# EAGLE board Small e-PaperShield v2.1 (EAGLE 6.4)
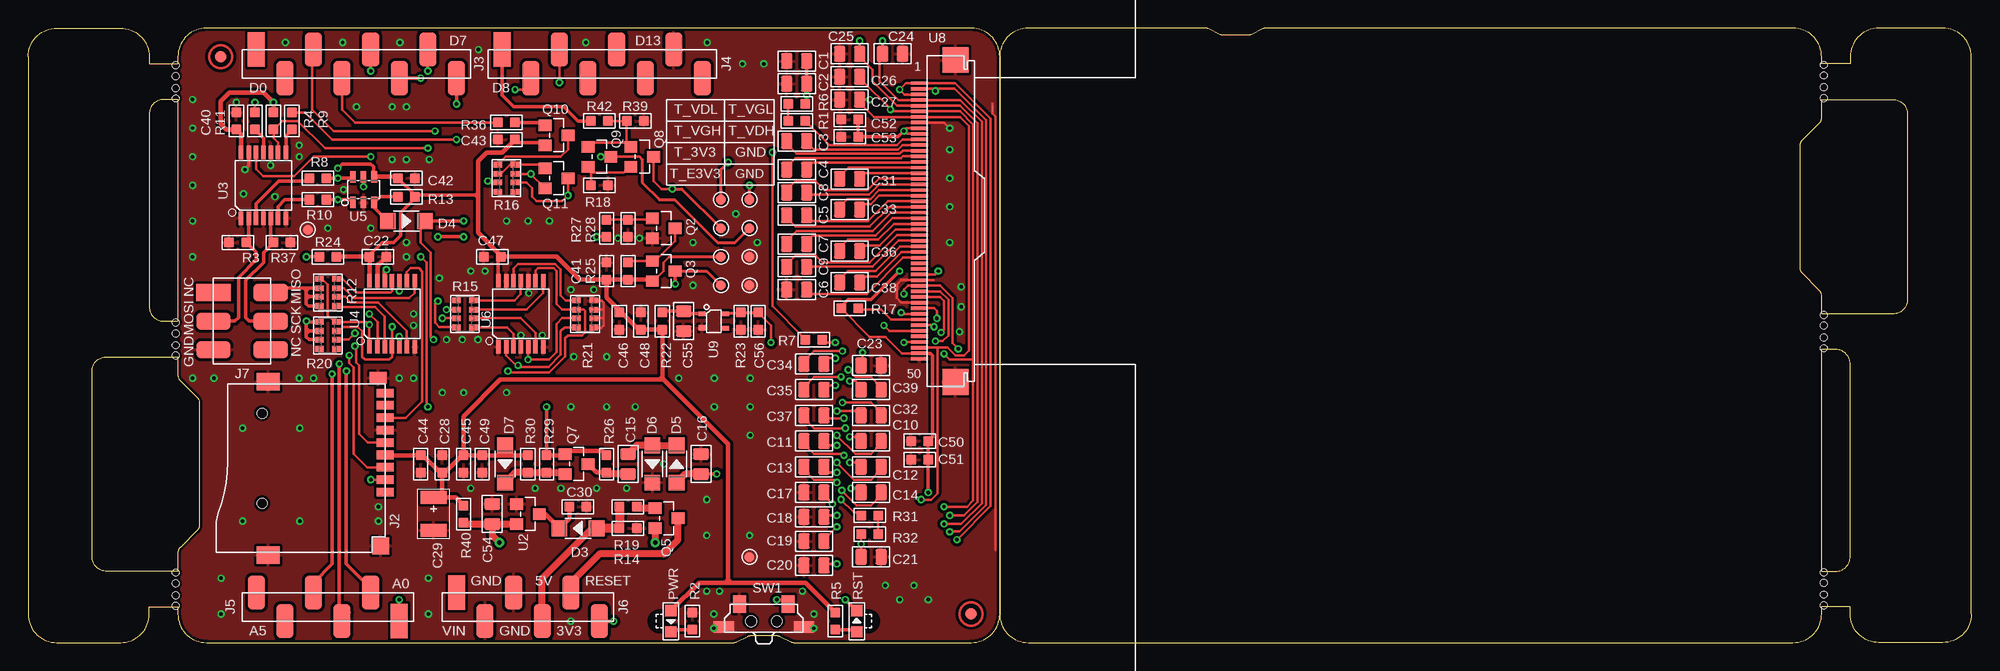
[diagram p0: board, top side]
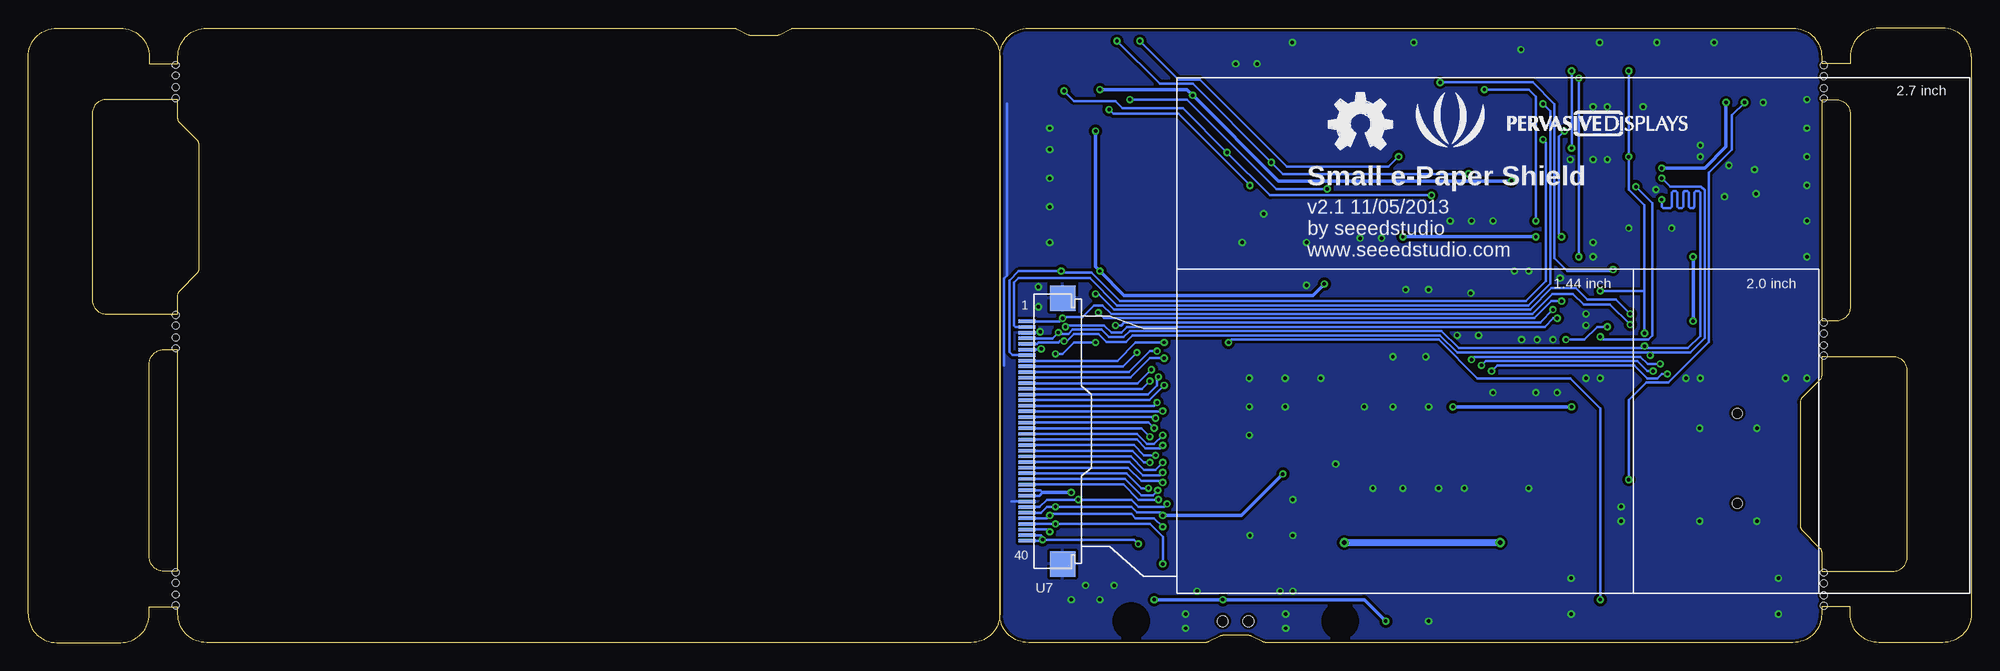
[diagram p1: board, bottom side, seen from below]

Size 172.62 x 54.61 mm. Coordinates in mm from the lower left corner, seen from the top.
Outline: 86.31,52.07 arc90 83.77,54.61 15.84,54.61 arc90 13.3,52.07 13.3,51.44 10.76,51.44 10.76,52.07 arc90 8.22,54.61 2.54,54.61 arc90 0,52.07 0,2.54 arc90 2.54,0 8.22,0 arc90 10.76,2.54 10.76,3.18 13.3,3.18 13.3,2.54 arc90 15.84,0 62.66,0 arc27 62.95,0.07 63.95,0.57 arc-27 64.23,0.63 66.47,0.63 arc-27 66.76,0.57 67.76,0.07 arc27 68.04,0 83.77,0 arc90 86.31,2.54
Outline: 86.31,2.54 86.31,52.07
Outline: 86.31,2.54 arc90 88.85,0 156.78,0 arc90 159.32,2.54 159.32,3.18 161.86,3.18 161.86,2.54 arc90 164.4,0 170.08,0 arc90 172.62,2.54 172.62,52.07 arc90 170.08,54.61 164.4,54.61 arc90 161.86,52.07 161.86,51.44 159.32,51.44 159.32,52.07 arc90 156.78,54.61 109.95,54.61 arc27 109.67,54.54 108.67,54.04 arc-27 108.38,53.98 106.14,53.98 arc-27 105.86,54.04 104.86,54.54 arc27 104.57,54.61 88.85,54.61 arc90 86.31,52.07
Outline: 86.31,52.07 86.31,2.54
Outline: 13.3,48.26 13.3,28.57 12.03,28.57 arc-90 10.76,29.84 10.76,46.99 arc-90 12.03,48.26 13.3,48.26
Outline: 13.3,25.4 13.3,23.76 arc45 13.49,23.31 15.02,21.78 arc-45 15.2,21.33 15.2,10.42 arc-45 15.02,9.97 13.49,8.44 arc45 13.3,7.99 13.3,6.35 6.95,6.35 arc-90 5.68,7.62 5.68,24.13 arc-90 6.95,25.4 13.3,25.4
Outline: 159.32,6.35 159.32,26.04 160.59,26.04 arc-90 161.86,24.77 161.86,7.62 arc-90 160.59,6.35 159.32,6.35
Outline: 159.32,29.21 159.32,30.85 arc45 159.13,31.3 157.6,32.83 arc-45 157.41,33.28 157.41,44.19 arc-45 157.6,44.64 159.13,46.17 arc45 159.32,46.62 159.32,48.26 165.67,48.26 arc-90 166.94,46.99 166.94,30.48 arc-90 165.67,29.21 159.32,29.21
Copper layers (1*16): Top 0.035mm / dielectric 1.5mm / Bottom 0.035mm
Design rules "SeeedStudio_rule_no_angle_090911 *": minimum track width 6mil, minimum drill 12mil, track to track 6mil, track to pad 6mil, pad to pad 6mil, via to via 6mil, smd to smd 0mil, copper to edge 10mil, drill to drill 10mil, minimum pad ring 10mil, minimum via ring 6mil, stop-mask expansion 2mil, vias tented up to drill 100mil, thermal gap 10mil
Net classes: 0 default: width 0.152 mm, drill 0.305 mm, clearance 0.152 mm
Holes 0.6 mm at 13.1,28.45 13.1,27.48 13.1,26.43 13.1,25.5 13.1,51.31 13.1,50.34 13.1,49.29 13.1,48.36 13.1,6.22 13.1,5.26 13.1,4.2 13.1,3.28 159.52,26.16 159.52,27.13 159.52,28.18 159.52,29.11 159.52,3.3 159.52,4.27 159.52,5.32 159.52,6.25 159.52,48.39 159.52,49.35 159.52,50.41 159.52,51.33
tRestrict: area 50,29.9 to 50.5,30.1; area 50,29.9 to 50.5,30.1; area 50,29.1 to 50.5,29.3; area 49.9,28.3 to 50.6,28.5; area 55.3,1.1 to 56.9,2.7; area 73.8,1.1 to 75.4,2.7
bRestrict: area 54.7,0.5 to 57.5,3.3; area 73.2,0.5 to 76,3.3

## Footprints (pad centres in the part's own frame; a part is rotated, then mirrored left to right if it is on the bottom)
C0805 = smd 1.016 x 1.397: 1 -0.889,0; 2 0.889,0
C0603 = smd 0.889 x 0.889: 1 -0.762,0; 2 0.762,0
AVX-B = smd 1.143 x 2.286: + -1.46,0; - 1.46,0
SOD123 = smd 1.397 x 1.397: + -1.651,0; - 1.651,0
TP_3535 = smd 0.889 x 0.889: T 0,0
9P-SMD-W/-RING = smd 1.524 x 0.762: 1 0,4.4; 2 0,3.3; 3 0,2.2; 4 0,1.1; 5 0,0; 6 0,-1.1; 7 0,-2.2; 8 0,-3.3; 9 0,-4.4 | smd 1.524 x 1.016: G1 0.6,-5.746 | smd 2.032 x 1.524: G2 10.373,-5.4; G3 10.373,10 | smd 1.524 x 1.524: G4 0.392,9.181 | hole 0.889: 10.9,-2.6; 10.9,5.4
8P-2.54-SMD = smd 3.048 x 1.524: 1 1.27,8.89; 2 -1.27,6.35; 3 1.27,3.81; 4 -1.27,1.27; 5 1.27,-1.27; 6 -1.27,-3.81; 7 1.27,-6.35; 8 -1.27,-8.89
6P-2.54-SMD = smd 3.048 x 1.524: 1 1.27,6.35; 2 -1.27,3.81; 3 1.27,1.27; 4 -1.27,-1.27; 5 1.27,-3.81; 6 -1.27,-6.35
2X3P-2.54-SMD = smd 3.048 x 1.524: 1 -2.54,2.54; 2 -2.54,0; 3 -2.54,-2.54; 4 2.54,-2.54; 5 2.54,0; 6 2.54,2.54
ROUND-MARK-1.0 = smd 1.016 x 1.016: P$1 0,0
LED-SIDE-VIEW-0603-RIGHT = smd 1 x 1: 1 0,-0.95; 2 0,0.95
SOT23 = smd 1.016 x 1.143: 1 -0.889,-1.016; 2 0.889,-1.016; 3 0,1.016
R0603 = smd 0.889 x 0.889: 1 -0.762,0; 2 0.762,0
1206-8-3.3X2.4 = smd 0.508 x 0.762: 1 -1.206,-0.762; 2 -0.381,-0.762; 3 0.381,-0.762; 4 1.206,-0.762; 5 1.206,0.762; 6 0.381,0.762; 7 -0.381,0.762; 8 -1.206,0.762
4P-SMD-7X3.5X3.5H = smd 1.143 x 1.524: 1 -2.159,1.524; 2 2.159,1.524 | smd 1.778 x 1.016: S1 -3.556,-0.508; S2 3.556,-0.508 | hole 0.95: -1.15,0; 1.15,0
TSSOP14 = smd 0.4 x 1.2: 1 -2,-2.925; 2 -1.3,-2.925; 3 -0.65,-2.925; 4 0,-2.925; 5 0.65,-2.925; 6 1.3,-2.925; 7 2,-2.925; 8 2,2.925; 9 1.3,2.925; 10 0.65,2.925; 11 0,2.925; 12 -0.65,2.925; 13 -1.3,2.925; 14 -2,2.925
SOT23-6 = smd 0.508 x 1.016: 1 -0.95,-1.143; 2 0,-1.143; 3 0.95,-1.143; 4 0.95,1.143; 5 0,1.143; 6 -0.95,1.143
40P-0.5 = smd 1.524 x 0.305: 1 -0.762,9.75; 2 -0.762,9.25; 3 -0.762,8.75; 4 -0.762,8.25; 5 -0.762,7.75; 6 -0.762,7.25; 7 -0.762,6.75; 8 -0.762,6.25; 9 -0.762,5.75; 10 -0.762,5.25; 11 -0.762,4.75; 12 -0.762,4.25; 13 -0.762,3.75; 14 -0.762,3.25; 15 -0.762,2.75; 16 -0.762,2.25; 17 -0.762,1.75; 18 -0.762,1.25; 19 -0.762,0.75; 20 -0.762,0.25; 21 -0.762,-0.25; 22 -0.762,-0.75; 23 -0.762,-1.25; 24 -0.762,-1.75; 25 -0.762,-2.25; 26 -0.762,-2.75; 27 -0.762,-3.25; 28 -0.762,-3.75; 29 -0.762,-4.25; 30 -0.762,-4.75; 31 -0.762,-5.25; 32 -0.762,-5.75; 33 -0.762,-6.25; 34 -0.762,-6.75; 35 -0.762,-7.25; 36 -0.762,-7.75; 37 -0.762,-8.25; 38 -0.762,-8.75; 39 -0.762,-9.25; 40 -0.762,-9.75 | smd 2.286 x 2.286: P1 2.413,11.811; P2 2.413,-11.811
50P-0.5 = smd 1.524 x 0.305: 1 -0.762,12.25; 2 -0.762,11.75; 3 -0.762,11.25; 4 -0.762,10.75; 5 -0.762,10.25; 6 -0.762,9.75; 7 -0.762,9.25; 8 -0.762,8.75; 9 -0.762,8.25; 10 -0.762,7.75; 11 -0.762,7.25; 12 -0.762,6.75; 13 -0.762,6.25; 14 -0.762,5.75; 15 -0.762,5.25; 16 -0.762,4.75; 17 -0.762,4.25; 18 -0.762,3.75; 19 -0.762,3.25; 20 -0.762,2.75; 21 -0.762,2.25; 22 -0.762,1.75; 23 -0.762,1.25; 24 -0.762,0.75; 25 -0.762,0.25; 26 -0.762,-0.25; 27 -0.762,-0.75; 28 -0.762,-1.25; 29 -0.762,-1.75; 30 -0.762,-2.25; 31 -0.762,-2.75; 32 -0.762,-3.25; 33 -0.762,-3.75; 34 -0.762,-4.25; 35 -0.762,-4.75; 36 -0.762,-5.25; 37 -0.762,-5.75; 38 -0.762,-6.25; 39 -0.762,-6.75; 40 -0.762,-7.25; 41 -0.762,-7.75; 42 -0.762,-8.25; 43 -0.762,-8.75; 44 -0.762,-9.25; 45 -0.762,-9.75; 46 -0.762,-10.25; 47 -0.762,-10.75; 48 -0.762,-11.25; 49 -0.762,-11.75; 50 -0.762,-12.25 | smd 2.286 x 2.286: P1 2.413,14.311; P2 2.413,-14.311
SC-82AB = smd 0.4 x 0.6: 1 -0.65,-1.05; 3 0.65,1.05; 4 -0.65,1.05 | smd 0.5 x 0.6: 2 0.6,-1.05

## Placement (x,y rotation side)
C1  DNP  [C0805]  68.27,51.69 180 top
C2  DNP  [C0805]  68.27,49.66 180 top
C3  DNP  [C0805]  68.27,44.58 180 top
C4  DNP  [C0805]  68.27,42.04 0 top
C5  DNP  [C0805]  68.27,37.97 180 top
C6  DNP  [C0805]  68.27,31.37 180 top
C7  DNP  [C0805]  68.27,35.43 0 top
C8  DNP  [C0805]  68.27,40 0 top
C9  DNP  [C0805]  68.27,33.4 0 top
C10  2.2uF  [C0805]  74.88,17.91 0 top
C11  2.2uF  [C0805]  69.8,17.91 180 top
C12  2.2uF  [C0805]  74.88,15.62 0 top
C13  2.2uF  [C0805]  69.8,15.62 180 top
C14  2.2uF  [C0805]  74.88,13.33 0 top
C15  2.2uF  [C0805]  53.29,15.88 90 top
C16  2.2uF  [C0805]  59.77,15.88 270 top
C17  2.2uF  [C0805]  69.8,13.33 0 top
C18  2.2uF  [C0805]  69.8,11.18 0 top
C19  2.2uF  [C0805]  69.8,9.02 0 top
C20  2.2uF  [C0805]  69.8,6.86 0 top
C21  DNP  [C0805]  74.88,7.62 180 top
C22  100nF  [C0603]  31.06,34.29 180 top
C23  2.2uF  [C0805]  74.88,24.64 180 top
C24  DNP  [C0805]  76.78,52.32 0 top
C25  DNP  [C0805]  72.97,52.32 180 top
C26  DNP  [C0805]  72.97,50.29 180 top
C27  DNP  [C0805]  72.97,48.26 180 top
C28  100nF  [C0603]  36.78,15.88 270 top
C29  100uF 6.3V  [AVX-B]  36.02,11.43 270 top
C30  100nF  [C0603]  48.84,12.06 180 top
C31  DNP  [C0805]  72.97,41.21 0 top
C32  2.2uF  [C0805]  74.88,20.19 180 top
C33  DNP  [C0805]  72.97,38.48 0 top
C34  2.2uF  [C0805]  69.8,24.77 0 top
C35  2.2uF  [C0805]  69.8,22.48 0 top
C36  DNP  [C0805]  72.97,34.8 0 top
C37  2.2uF  [C0805]  69.8,20.19 180 top
C38  DNP  [C0805]  72.97,32 0 top
C39  2.2uF  [C0805]  74.88,22.48 180 top
C40  100nF  [C0603]  18.49,46.36 270 top
C41  100nF  [C0603]  51.38,33.02 270 top
C42  100nF  [C0603]  33.6,41.27 180 top
C43  100nF  [C0603]  42.49,44.7 0 top
C44  100nF  [C0603]  34.87,15.88 90 top
C45  100nF  [C0603]  38.68,15.88 90 top
C46  100nF  [C0603]  52.53,28.57 90 top
C47  100nF  [C0603]  41.22,34.29 0 top
C48  100nF  [C0603]  54.43,28.57 270 top
C49  100nF  [C0603]  40.33,15.88 90 top
C50  100nF  [C0603]  79.2,17.91 0 top
C51  100nF  [C0603]  79.2,16.26 0 top
C52  100nF  [C0603]  72.97,46.48 0 top
C53  100nF  [C0603]  72.97,44.96 0 top
C54  2.2uF  [C0805]  41.22,11.43 90 top
C55  2.2uF  [C0805]  58.24,28.57 270 top
C56  100nF  [C0603]  64.85,28.57 90 top
D3  B5819W  [SOD123]  48.84,10.16 180 top
D4  B5819W  [SOD123]  33.6,37.47 0 top
D5  B5819W  [SOD123]  57.61,15.88 90 top
D6  B5819W  [SOD123]  55.45,15.88 270 top
D7  DNP  [SOD123]  42.37,15.88 270 top
GND  [TP_3535]  64.08,31.75 0 top
J2  3300060P1-ST-TF-003A  [9P-SMD-W/-RING]  31.7,17.78 180 top
J3  2.54-8p-male-SMD  [8P-2.54-SMD]  29.16,51.44 90 top
J4  2.54-8p-male-SMD  [8P-2.54-SMD]  51,51.44 90 top
J5  2.54-6p-male-SMD  [6P-2.54-SMD]  26.62,3.18 270 top
J6  2.54-6p-male-SMD  [6P-2.54-SMD]  44.4,3.18 90 top
J7  2.54-2x3p-female-SMD  [2X3P-2.54-SMD]  19,28.57 0 top
P1  [ROUND-MARK-1.0]  17.09,52.07 0 top
P2  [ROUND-MARK-1.0]  83.77,2.54 0 top
PWR  led-green  [LED-SIDE-VIEW-0603-RIGHT]  57.1,1.91 180 top
Q2  2N7002  [SOT23]  56.46,36.83 270 top
Q3  MOSFET-P-044021001  [SOT23]  56.46,33.02 270 top
Q5  MOSFET-P-044021001  [SOT23]  56.72,11.05 270 top
Q7  MOSFET-P-044021001  [SOT23]  48.72,15.88 270 top
Q8  2N7002  [SOT23]  54.56,43.18 270 top
Q9  2N7002  [SOT23]  50.75,43.18 270 top
Q10  MOSFET-P-044021001  [SOT23]  46.94,45.09 270 top
Q11  2N7002  [SOT23]  46.94,41.27 270 top
R1  DNP  [R0603]  68.27,46.36 180 top
R2  1k  [R0603]  59,1.91 90 top
R3  100k  [R0603]  18.62,35.56 180 top
R4  100k  [R0603]  21.79,46.36 90 top
R5  1k  [R0603]  71.7,1.91 270 top
R6  DNP  [R0603]  68.27,47.88 0 top
R7  DNP  [R0603]  69.8,26.92 0 top
R8  100R  [R0603]  25.73,41.27 0 top
R9  100R  [R0603]  23.44,46.36 90 top
R10  100R  [R0603]  25.73,39.37 0 top
R11  100R  [R0603]  20.14,46.36 90 top
R12  1k  [1206-8-3.3X2.4]  26.62,31.11 90 top
R13  100k  [R0603]  33.6,39.62 0 top
R14  1M  [R0603]  53.29,10.16 180 top
R15  DNP  [1206-8-3.3X2.4]  38.81,29.21 90 top
R16  100k  [1206-8-3.3X2.4]  42.49,41.27 270 top
R17  DNP  [R0603]  72.97,29.72 180 top
R18  0R  [R0603]  50.75,40.64 180 top
R19  1k  [R0603]  53.29,12.06 0 top
R20  100k  [1206-8-3.3X2.4]  26.62,27.3 270 top
R21  DNP  [1206-8-3.3X2.4]  49.48,29.21 90 top
R22  100R  [R0603]  56.34,28.57 90 top
R23  1M  [R0603]  63.32,28.57 90 top
R24  1k  [R0603]  26.62,34.29 180 top
R25  100k  [R0603]  53.29,33.02 90 top
R26  DNP  [R0603]  51.38,15.88 90 top
R27  1k  [R0603]  51.38,36.83 90 top
R28  100k  [R0603]  53.29,36.83 90 top
R29  100k  [R0603]  46.05,15.88 90 top
R30  0R  [R0603]  44.4,15.88 90 top
R31  1k  [R0603]  74.75,11.3 180 top
R32  1k  [R0603]  74.75,9.65 0 top
R36  1k  [R0603]  42.49,46.23 0 top
R37  100k  [R0603]  22.55,35.56 0 top
R39  100k  [R0603]  53.92,46.36 180 top
R40  0R  [R0603]  38.68,11.43 270 top
R42  1k  [R0603]  50.75,46.36 180 top
RST  led-red  [LED-SIDE-VIEW-0603-RIGHT]  73.61,1.91 0 top
SW1  BUTTON-4P-REINFORCE'TS-1188E'  [4P-SMD-7X3.5X3.5H]  65.35,1.91 0 top
T_3V3  [TP_3535]  61.54,34.29 90 top
T_E3V3  [TP_3535]  61.54,31.75 270 top
T_VDH  [TP_3535]  64.08,36.83 270 top
T_VDL  [TP_3535]  61.54,39.37 180 top
T_VGH  [TP_3535]  61.54,36.83 270 top
T_VGL  [TP_3535]  64.08,39.37 90 top
TP7  [TP_3535]  24.84,36.7 0 top
TP8  [TP_3535]  64.08,7.62 0 top
TP9  [TP_3535]  64.08,34.29 0 top
U2  XC6206-3.3-1300260P1  [SOT23]  44.4,11.43 270 top
U3  74VHC125PW  [TSSOP14]  20.9,40.64 0 top
U4  74VHC125PW  [TSSOP14]  32.33,29.21 0 top
U5  GT20L16P1Y  [SOT23-6]  29.79,40.26 0 top
U6  DNP  [TSSOP14]  43.76,29.21 0 top
U7  EPD 1.44/2.0/2.7 inch  [40P-0.5]  83.13,18.8 0 bottom
U8  DNP  [50P-0.5]  79.96,37.47 0 top
U9  S-8120CNB-DRB-TF-G//200021001  [SC-82AB]  60.91,28.57 270 top
U$20  [LOGO_SILK]  46.3,45.72 0 bottom
U$47  [OSHW_FILLX200_NOTEXT]  57.1,43.81 0 bottom

## Library data of the parts
C1-C56 D3-D7 PWR Q2 Q8 Q9 Q11 R1-R32 R36 R37 R39 R40 R42 RST SW1 = Discrete
GND P1 P2 T_3V3 T_E3V3 T_VDH T_VDL T_VGH T_VGL TP7-TP9 = Discrete; PARTNO: DNP
J2 = OPL-NEW
J3-J7 = Connector
Q3 Q5 Q7 Q10 U2 = OPL
U3 U4 U6 = IC
U5 U8 U9 = template
U7 = moudle
U$20 U$47 = Logo

## Nets
3V3_LOG: R20.1 R20.2 R20.3 R24.2
/EPD_CS: R12.5 R20.8 U4.1 U7.1 U8.41
/SD_CS: J2.2 R11.2
/WS_CS: D4.+ R13.1 U5.3
ADC_IN: R7.2 U7.8
EPD_/RESET: R9.2 U7.7 U8.35
EPD_BORDER: Q11.3 R7.1 R16.6 U7.38 U8.2
EPD_CKV: R15.7 U8.44
EPD_OE123: R15.8 U8.42
EPD_SO: U4.2 U7.6 U8.37
EPD_STV_IN: R15.6 U8.45
EPD_VCL: C23.2 U7.9
EPD_VCOM_PANEL: C1.1 C2.1 C21.2 R6.2 R16.3 R32.1 U7.39 U7.40 U8.1 U8.3
EPD_VDH: C19.2 C25.1 Q9.3 T_VDH.T U7.36 U8.5
EPD_VDL: C20.2 C24.1 Q11.2 R16.7 T_VDL.T U7.37 U8.4
EPD_VGH: C17.2 C27.1 Q8.3 T_VGH.T U7.34 U8.7 U8.48
EPD_VGL: C16.2 C18.2 C26.1 D5.+ T_VGL.T U7.35 U8.6 U8.47
GND: C1.2 C2.2 C6.2 C16.1 C17.1 C18.1 C19.1 C20.1 C21.1 C22.1 C23.1 C24.2 C25.2 C26.2 C27.2 C28.1 C29.- C30.1 C40.1 C41.1 C42.1 C43.1 C44.1 C45.1 C46.1 C47.1 C48.1 C49.1 C50.1 C51.1 C52.1 C53.1 C54.2 C55.2 C56.1 D6.- GND.T J2.6 J2.G1 J2.G2 J2.G3 J2.G4 J4.7 J6.2 J6.3 J7.3 Q2.2 R2.2 R3.2 R14.1 R18.1 R21.1 R21.2 R21.3 R21.4 R23.1 R28.1 R37.2 R39.1 SW1.1 SW1.S1 SW1.S2 TP7.T TP8.T TP9.T U2.1 U3.1 U3.4 U3.7 U3.10 U3.13 U4.7 U4.13 U5.2 U6.1 U6.4 U6.7 U6.10 U6.13 U7.3 U7.33 U7.P1 U7.P2 U8.8 U8.36 U8.40 U8.50 U8.P1 U8.P2 U9.2
M_/EPD_CS: J4.3 U4.12
M_/SD_CS: J3.5 R20.6 U3.12 U4.10
M_/WORD_STOCK_CS: D4.- J4.2 R20.7 U4.4
M_CKV: J5.3 R21.7 U6.5
M_EPD_/RESET: J3.7 R4.1 U3.9
M_EPD_BORDER: J3.4 R36.1
M_EPD_BUSY: J3.8 U7.2
M_EPD_DISCHARGE: J4.1 R42.2
M_EPD_PANEL_ON: J3.3 R27.1
M_EPD_PWM: J3.6 Q7.1 R26.2 R29.2
M_MISO: J7.6 R12.6 R12.7 R12.8
M_MOSI: J7.2 R3.1 U3.2
M_OE123: J5.2 R21.8 U6.2
M_RESET: J6.6 RST.2 SW1.2
M_SCK: J7.5 R37.1 U3.5
M_STV_IN: J5.4 R21.6 U6.9
M_TEMP_SEN: C56.2 J5.1 R23.2 U9.4
M_VCC_3V3: J6.5 Q5.3
M_VCC_5V: D3.+ J6.4 R14.2 R19.1
N$1: PWR.2 R2.1
N$2: Q5.1 R19.2
N$3: C15.2 D5.- D6.+
N$4: D7.- Q7.2 R29.1 R30.1
N$6: Q2.1 R27.2 R28.2
N$7: R11.1 U3.11
N$8: C30.2 D3.- U2.3
N$9: C15.1 Q7.3 R26.1
N$10: Q8.1 Q9.1 R39.2 R42.1
N$11: Q2.3 Q3.1 R25.2
N$12: R31.1 R32.2
N$13: Q10.3 R16.1
N$14: Q10.1 R36.2
N$15: C4.1 U8.14
N$16: Q8.2 Q9.2 R18.2
N$19: R21.5 U6.12
N$20: R12.1 U4.3
N$21: R12.2 U4.6
N$22: R12.3 U4.8
N$23: R15.1 U6.3
N$24: R15.3 U6.8
N$25: R15.4 U6.11
N$26: R15.2 U6.6
N$27: R12.4 U4.11
N$28: Q11.1 R16.2 R16.8
N$30: R1.2 R6.1
N$33: R15.5
N$34: C34.1 U7.10
N$35: C34.2 U7.11
N$36: C39.1 U7.12
N$37: C39.2 U7.13
N$39: C4.2 U8.15
N$40: C3.1 U8.12
N$41: C31.2 U8.17
N$42: C31.1 U8.16
N$43: C8.1 U8.18
N$44: C8.2 U8.19
N$45: C33.2 U8.21
N$46: C33.1 U8.20
N$47: C5.1 U8.22
N$48: C5.2 U8.23
N$49: C7.1 U8.24
N$50: C7.2 U8.25
N$51: C36.1 U8.26
N$52: C36.2 U8.27
N$53: C9.1 U8.28
N$54: C9.2 U8.29
N$55: C38.1 U8.30
N$56: C38.2 U8.31
N$57: C6.1 U8.32
N$58: R1.1 U8.11
N$67: R17.1 U8.43
N$74: R8.1 U3.3
N$76: R10.1 U3.6
N$80: R9.1 U3.8
N$81: C35.1 U7.14
N$82: C3.2 U8.13
N$85: C35.2 U7.15
N$87: R5.2 RST.1
N$88: C32.1 U7.16
N$89: C32.2 U7.17
N$90: C37.1 U7.18
N$91: C37.2 U7.19
N$92: C10.1 U7.20
N$93: C10.2 U7.21
N$94: C11.1 U7.22
N$95: C11.2 U7.23
N$96: C12.1 U7.24
N$97: C12.2 U7.25
N$98: C13.1 U7.26
N$99: C13.2 U7.27
N$100: C14.1 U7.28
N$101: C14.2 U7.29
S_MOSI: J2.3 R8.2 U5.6 U7.5 U8.38
S_SCK: J2.5 R10.2 U5.1 U7.4 U8.39
SD_DO: J2.7 U4.9
VCC_3V3: C22.2 C28.2 C29.+ C40.2 C41.2 C42.2 C43.2 C44.2 C45.2 C46.2 C47.2 C48.2 C49.2 D7.+ J2.4 PWR.1 Q3.2 Q10.2 R4.2 R5.1 R13.2 R22.1 R24.1 R25.1 R30.2 R40.1 T_3V3.T U3.14 U4.14 U5.4 U6.14
VCC_3V3_EPD: C50.2 C51.2 C52.2 C53.2 Q3.3 R17.2 T_E3V3.T U7.31 U7.32 U8.9 U8.10 U8.49
VCC_OUT: C54.1 Q5.2 R40.2 U2.2
VCOM_DRIVER: R31.2 U7.30
VDD: C55.1 R22.2 U9.1
WS_DO: U4.5 U5.5

## Tracks (layer width: path | path; a pad name or v marks a point on that pad's centre or on a via)
3V3_LOG  (via drill 0.3 pad 0.64)
  Top 0.305: R24.2 v24.71,34.29 | R20.1 24.78,28.51 v24.71,28.57 24.71,28.32 | R20.3 24.97,26.92 24.71,27.18 24.71,27.43 | 24.71,27.43 24.71,27.69 | 24.71,27.69 24.71,27.94 | 24.71,27.94 24.71,28.32 | R20.2 24.97,27.69 | 24.97,27.69 24.71,27.69 | 24.71,27.43 24.97,27.69 | 24.97,27.69 24.71,27.94 | 24.71,28.32 24.84,28.45
  Bottom 0.305: v24.71,34.29 v24.71,28.57
/EPD_CS  (via drill 0.3 pad 0.64)
  Top 0.203: R12.5 26.12,32.32 26.62,31.83 26.62,29.08 27.25,28.45 27.32,28.45 R20.8 30.05,28.51 v30.3,28.26 30.3,26.32 U4.1 | U8.41 80.47,29.71 80.72,29.46 v80.72,28.83
  Bottom 0.203: U7.1 81,28.55 v80.72,28.83 80.59,28.96 78.94,28.96 77.93,29.97 77.16,29.97 76.4,29.21 39,29.21 37.22,30.99 35.38,30.99 34.44,30.05 32.09,30.05 v30.3,28.26
/SD_CS  (via drill 0.3 pad 0.64)
  Top 0.203: R11.2 v20.14,48.01 | v30.43,14.48 J2.2
  Bottom 0.203: v30.43,14.48 30.43,21.54 28.86,23.11 26.91,23.11 23.32,26.71 23.32,41.78 21.28,43.81 21.28,46.86 v20.14,48.01
/WS_CS
  Top 0.305: R13.1 31.25,39.62 U5.3 30.74,38.67 D4.+
ADC_IN  (via drill 0.3 pad 0.64)
  Top 0.203: v71.7,26.67 70.69,26.67 70.69,26.8 R7.2
  Bottom 0.203: U7.8 75.87,25.05 74.24,26.67 v71.7,26.67
EPD_/RESET  (via drill 0.3 pad 0.64)
  Top 0.203: U8.35 80.54,32.72 v80.85,33.02 | R9.2 24.59,47.12 27,44.7 v38.05,44.7
  Bottom 0.203: U7.7 85.17,25.55 85.45,25.83 85.45,32.2 84.63,33.02 v80.85,33.02 80.72,32.89 78.18,32.89 75.64,30.35 39.56,30.35 37.8,32.12 37.8,44.45 v38.05,44.7
EPD_BORDER  (via drill 0.3 pad 0.64)
  Top 0.203: U8.2 80.59,49.22 | 80.59,49.22 82.31,49.22 85.1,46.42 85.1,12.25 82.75,9.91 81.93,9.91 v81.86,9.84 | v80.59,49.02 80.59,49.22 | Q11.3 v47.95,39.75 47.45,39.24 45.16,39.24 44.78,39.62 44.78,40.39 44.27,40.89 R16.6 | R7.1 68.91,26.92 68.91,26.99 68.85,27.05 68.85,27.18 66.12,29.91 v66.12,43.56
  Bottom 0.203: U7.38 82.07,10.05 v81.86,9.84 | v47.95,39.75 62.31,39.75 v66.12,43.56 70.05,47.5 75.39,47.5 76.02,48.13 79.7,48.13 v80.59,49.02
EPD_CKV  (via drill 0.3 pad 0.64)
  Top 0.203: U8.44 80.32,28.21 v80.47,28.07 | R15.7 v36.78,28.83
  Bottom 0.203: v80.47,28.07 80.34,28.19 77.04,28.19 76.4,27.56 75.51,27.56 75.01,28.07 37.87,28.07 37.11,28.83 v36.78,28.83
EPD_OE123  (via drill 0.3 pad 0.64)
  Top 0.203: R15.8 37.99,28.07 36.52,28.07 36.14,28.45 36.14,30.1 v36.4,30.35 | U8.42 77.67,29.21 v77.55,29.34
  Bottom 0.203: v36.4,30.35 37.29,30.35 38.81,28.83 77.04,28.83 v77.55,29.34
EPD_SO  (via drill 0.3 pad 0.64)
  Top 0.203: v77.8,30.99 77.8,31.37 78.15,31.71 U8.37 81.01,31.71 82.12,30.61 82.12,26.61 v82.63,26.1 | U4.2 31.03,28.48 v30.3,29.21
  Bottom 0.203: v77.8,30.99 77.55,30.99 76.15,29.59 39.19,29.59 37.29,31.5 35.13,31.5 34.11,30.48 31.57,30.48 v30.3,29.21 | U7.6 82.68,26.05 v82.63,26.1
EPD_STV_IN  (via drill 0.3 pad 0.64)
  Top 0.203: U8.45 79.17,27.69 76.53,27.69 v76.02,28.19 | 37.92,29.46 R15.6 v37.16,29.59
  Bottom 0.203: v76.02,28.19 75.51,28.19 75.26,28.45 38.3,28.45 v37.16,29.59
EPD_VCL  (via drill 0.3 pad 0.64)
  Top 0.203: v74.12,25.78 74.12,24.77 C23.2
  Bottom 0.203: U7.9 75.35,24.55 v74.12,25.78
EPD_VCOM_PANEL  (via drill 0.3 pad 0.64)
  Top 0.203: R32.1 v73.99,8.76 C21.2 | v82.5,9.14 85.48,12.13 85.48,46.55 82.31,49.72 U8.1 77.98,49.72 v77.42,49.15 77.85,48.72 U8.3
  Top 0.305: C1.1 C2.1 v69.16,48.64 69.16,48.01 R6.2 | R16.3 40.97,40.89 v40.84,41.02
  Bottom 0.203: U7.40 82.6,9.05 v82.5,9.14 | U7.39 82.65,9.55 82.5,9.4 v82.5,9.14 | v82.5,9.14 74.37,9.14 v73.99,8.76
  Bottom 0.305: v77.42,49.15 69.67,49.15 v69.16,48.64 61.54,41.02 v40.84,41.02
EPD_VDH  (via drill 0.3 pad 0.64)
  Top 0.203: v71.83,10.29 70.69,9.14 C19.2 | v81.86,11.3 83.13,11.3 84.34,12.51 84.34,46.16 82.79,47.72 U8.5 77.2,47.72 75.01,49.91 75.01,50.93 73.99,51.94 73.99,52.07 73.86,52.2 C25.1 v73.86,53.47 | v50.88,43.18 Q9.3 54.3,43.18 54.56,42.93
  Top 0.254: 54.56,42.93 54.56,40.9 56.09,39.37 57.44,39.37 61.25,35.56 62.81,35.56 T_VDH.T
  Bottom 0.203: v71.83,10.29 72.59,11.05 74.24,11.05 74.62,11.43 81.74,11.43 v81.86,11.3 82.12,11.05 U7.36 | v73.86,53.47 70.43,50.04 68.53,50.04 60.78,42.29 51.77,42.29 v50.88,43.18
EPD_VDL  (via drill 0.3 pad 0.64)
  Top 0.203: v71.83,6.98 70.69,6.98 C20.2 | v81.36,10.54 82.88,10.54 84.72,12.38 84.72,46.29 82.8,48.22 U8.4 77.34,48.22 75.64,49.91 75.64,52.07 C24.1 v75.89,53.47 | R16.7 v44.65,41.66 Q11.2 | 45.8,40.26 Q11.2 | 46.05,40.26 Q11.2
  Top 0.254: T_VDL.T 61.54,42.04 v62.18,42.67
  Bottom 0.203: U7.37 81.48,10.55 | 81.48,10.55 72.98,10.55 71.83,9.4 v71.83,6.98 | v75.89,53.47 72.08,49.66 69.16,49.66 v62.18,42.67 61.16,41.66 v44.65,41.66 | v81.36,10.54 81.48,10.54 81.48,10.55
EPD_VGH  (via drill 0.3 pad 0.64)
  Top 0.203: v71.45,12.32 70.69,13.08 C17.2 | 79.2,26.23 U8.48 79.25,26.21 79.26,26.23 80.59,26.23 | 73.86,48.01 75.15,46.72 U8.7 82.77,46.72 83.58,45.91 83.58,25.97 83.13,25.53 82.37,25.53 81.67,26.23 80.97,26.23 | C27.1 v74.75,48.26 | v79.32,12.7 80.21,12.7 80.77,13.26 80.77,26.21 80.78,26.23 | 80.59,26.23 80.78,26.23 | 80.97,26.23 80.78,26.23 | 80.59,26.23 80.78,26.04 80.97,26.23 | Q8.3 55.57,41.02 56.27,40.32 v57.23,40.32
  Top 0.254: v57.23,40.32 58.05,40.32 T_VGH.T
  Top 0.305: 73.86,48.01 C27.1
  Bottom 0.203: U7.34 82.77,12.05 82.12,12.7 v79.32,12.7 74.62,12.7 73.99,12.06 71.7,12.06 v71.45,12.32 | v74.75,48.26 69.67,48.26 61.73,40.32 v57.23,40.32
EPD_VGL  (via drill 0.3 pad 0.64)
  Top 0.203: 70.69,11.3 C18.2 70.81,11.3 v71.83,11.3 | 83.95,25.15 83.95,46.04 82.78,47.22 U8.6 76.81,47.22 76.59,47.44 | 83.95,25.15 83.95,12.63 83.39,12.06 v81.36,12.06 | U8.47 77.84,26.71 v77.8,26.67 | C26.1 74.12,50.04 74.12,49.91 76.59,47.44 | 83.95,25.15 81.86,25.15 v81.36,25.65 | v76.59,47.37 76.59,47.44
  Top 0.254: T_VGL.T v64.08,40.64
  Top 0.305: C16.2 v61.16,14.99
  Top 0.61: C16.2 58.37,14.99 D5.+
  Bottom 0.203: U7.35 82.64,11.55 82.12,12.06 v81.36,12.06 74.62,12.06 74.12,11.56 72.08,11.56 v71.83,11.3 | v76.59,47.37 76.21,46.99 70.43,46.99 v64.08,40.64 | v81.36,25.65 80.72,25.65 79.7,26.67 v77.8,26.67
  Bottom 0.305: v71.83,11.3 64.85,11.3 v61.16,14.99
GND  (via drill 0.3 pad 0.64)
  Top 0.203: U8.8 81.37,46.22 v81.86,45.72 | 51.13,29.59 51.13,28.83 | 51.13,28.83 51.13,28.19 50.88,27.94 50.3,27.94 R21.1 | R21.3 51.13,29.59 | R21.2 51.13,28.83 | U8.40 77.56,30.21 77.16,30.61 77.16,31.83 77.55,32.22 U8.36 80.42,32.22 | 85.67,47.88 85.67,46.99 85.93,46.74 85.93,8.25 | R21.4 50.94,30.42 51.13,30.23 51.13,29.59
  Top 0.305: U3.13 19.6,42.39 v19.25,42.04
  Top 0.406: U4.13 31.03,33.5 C22.1
  Bottom 0.203: U7.33 85.27,12.55 | U7.3 82.8,27.55 v82.73,27.62 | 85.67,47.88 85.67,32.64 85.94,32.37 85.94,24.65
  other vias: 18.49,48.01 21.54,42.42 24.08,44.2 24.08,43.18 32.33,42.93 19.13,39.88 21.92,39.62 64.08,9.52 65.35,51.44 60.27,9.52 63.45,51.44 81.86,43.81 81.86,41.27 81.86,38.73 81.86,35.56 52.4,35.94 54.3,35.94 48.21,31.37 50.24,31.37 42.49,22.23 60.27,12.7 48.21,20.95 51.38,20.95 53.92,20.95 44.4,37.47 46.3,37.47 42.49,37.47 39.32,13.72 45.03,13.72 53.16,13.72 36.78,22.23 38.68,22.23 76.15,5.08 78.69,5.08 82.88,31.62 25.35,23.5 60.91,2.54 77.42,3.81 79.96,3.81 39.95,26.92 40.59,33.02 39.32,33.02 44.46,31.05 43.76,27.3 32.97,23.5 34.24,23.5 34.24,28.19 34.24,29.21 35.64,42.93 36.52,32.38 38.56,26.92 37.16,26.92 82.88,29.84 33.6,42.93 33.6,47.62 32.33,47.62 29.16,47.62 24.08,23.5 48.46,25.4 51.38,25.4 26.62,36.83 30.43,36.83 28.02,40.26 60.27,4.57 61.42,4.57 68.78,4.57 69.8,2.54 33.6,34.29 33.6,35.56 45.67,27.3 60.91,1.27 69.8,1.27 19.05,10.79 24.13,10.79 24.13,19.05 19.05,19.05 35.56,2.54 35.56,5.71 64.13,20.95 64.13,18.41 60.96,20.95 64.13,23.5 60.96,23.5 57.78,23.5 16.51,23.5 14.6,23.5 40,52.7 27.94,53.34 22.86,53.34 33.02,53.34 49.53,53.34 60.32,53.34 31.11,10.79 31.11,12.06 64.77,35.56 59.05,31.75 59.05,35.56 62.86,38.1 14.6,48.26 14.6,45.72 14.6,43.18 14.6,40.64 14.6,37.47 14.6,34.29 17.14,2.54 17.14,5.71 47.32,13.72 50.49,13.72 56.46,15.88 48.21,1.91
  pour Bottom (isolate 0.254): 1.85,0 86.31,0 86.31,54.61 1.85,54.61
  pour Top (isolate 0.254): 1.85,0 86.31,0 86.31,54.61 1.85,54.61
M_/EPD_CS  (via drill 0.3 pad 0.64)
  Top 0.203: J4.3 v47.19,49.78
  Top 0.406: U4.12 31.68,33.01 v31.83,33.15
  Bottom 0.203: v31.83,33.15 31.95,33.02 35.89,33.02 37.03,34.16 37.03,47.85 38.97,49.78 v47.19,49.78
M_/SD_CS  (via drill 0.3 pad 0.64)
  Top 0.203: U3.12 20.25,42.08 20.87,41.47 23.63,41.47 25.35,43.18 v30.43,43.18 | v32.97,31.24 32.97,32.12 U4.10 | R20.6 28.46,26.92 v29.03,27.5
  Top 0.305: J3.5 v30.43,50.8
  Bottom 0.203: v30.43,50.8 v30.43,43.18 30.43,40.26 29.03,38.86 29.03,31.24 | v29.03,27.5 29.03,31.24 | v32.97,31.24 29.03,31.24
M_/WORD_STOCK_CS  (via drill 0.3 pad 0.64)
  Top 0.203: v32.33,28.07 U4.4 32.33,25.4 32.08,25.15 29.92,25.15 29.67,25.4 29.67,27.69 29.29,28.07 28.02,28.07 27.63,27.69 R20.7 | 35.76,37.34 35.64,37.47 | D4.- 34.87,37.08 34.87,35.56 35.76,34.67 35.76,27.18 v36.02,26.92 | v43.26,49.15 44.65,49.15 J4.2
  Top 0.305: v38.68,37.47 35.64,37.47 D4.-
  Bottom 0.203: v43.26,49.15 39.32,49.15 38.68,48.51 v38.68,37.47 | v36.02,26.92 34.37,26.92 33.22,28.07 v32.33,28.07
M_CKV  (via drill 0.3 pad 0.64)
  Top 0.203: R21.7 47.45,28.83 46.94,28.32 46.94,25.81 46.27,25.15 v44.4,25.15 44.4,26.27 U6.5
  Top 0.305: 28.52,2.67 28.27,2.41 | 28.27,2.41 28.02,2.16 | 28.02,2.16 27.76,1.91 J5.3 | 27.89,2.29 28.02,2.16 | v27.63,24.77 27.63,2.41 28.27,2.41
  Bottom 0.203: v27.63,24.77 28.75,24.77 29.38,25.4 44.14,25.4 v44.4,25.15
M_EPD_/RESET  (via drill 0.3 pad 0.64)
  Top 0.203: U3.9 22.2,44.42 21.79,44.83 R4.1 22.55,46.36 23.95,46.36 26.36,43.94 v35.51,43.94
  Top 0.305: J3.7 v35.51,50.8
  Bottom 0.203: v35.51,43.94 v35.51,50.8
M_EPD_BORDER
  Top 0.203: R36.1 29.03,46.23 27.89,47.37 J3.4
M_EPD_BUSY  (via drill 0.3 pad 0.64)
  Top 0.305: J3.8 v38.05,47.88
  Bottom 0.203: U7.2 84.89,28.05 85.04,28.19 85.04,32 84.66,32.38 78.31,32.38 75.89,29.97 39.35,29.97 37.41,31.91 37.41,47.24 v38.05,47.88
M_EPD_DISCHARGE
  Top 0.305: R42.2 48.84,46.36 47.57,47.62 43.13,47.62 42.11,48.64 J4.1
M_EPD_PANEL_ON  (via drill 0.3 pad 0.64)
  Top 0.203: J3.3 25.22,52.58 25.22,47.37 27.13,45.47 v36.14,45.47
  Top 0.305: R27.1 v50.49,36.07 | v38.68,36.07 v36.4,36.07
  Bottom 0.203: v36.4,36.07 36.65,36.32 36.65,44.96 v36.14,45.47
  Bottom 0.305: v50.49,36.07 v38.68,36.07
M_EPD_PWM  (via drill 0.3 pad 0.64)
  Top 0.203: v34.87,34.29 35.38,33.78 35.38,21.08 v35.51,20.95
  Top 0.305: J3.6 v34.87,50.16 | v46.05,20.95 46.05,16.76 R29.2
  Top 0.406: Q7.1 47.7,17.02 51,17.02 R26.2 | 47.7,16.64 46.18,16.64 46.05,16.76
  Top 0.61: 47.7,16.64 Q7.1
  Bottom 0.203: v34.87,50.16 v34.87,34.29
  Bottom 0.305: v35.51,20.95 v46.05,20.95
M_MISO
  Top 0.305: R12.6 24.97,31.5 | 24.97,31.5 24.71,31.5 | 24.71,31.5 24.46,31.5 | 24.46,31.5 21.92,31.5 | R12.8 24.9,29.91 24.71,30.1 24.71,30.48 | 24.71,30.48 24.71,30.73 | 24.71,30.73 24.71,30.99 | 24.71,30.99 24.71,31.24 | 24.71,31.24 24.71,31.5 | R12.7 24.97,30.73 | 24.97,30.73 24.71,30.73 | 24.97,31.5 24.71,31.24 | 24.71,31.24 24.46,31.5 | 24.71,30.99 24.97,30.73 | 24.97,30.73 24.71,30.48
  Top 0.61: 21.92,31.5 J7.6
M_MOSI
  Top 0.305: U3.2 19.6,35.78 R3.1 | R3.1 19.38,35.43 | J7.2 18.36,28.57 18.68,28.89 18.68,32.45 20.25,34.02 20.25,34.69 R3.1
M_OE123  (via drill 0.3 pad 0.64)
  Top 0.203: J5.2 30.43,5.33 | U6.2 42.46,25.53 43.36,24.64 v43.51,24.64 43.64,24.51 46.21,24.51 47.32,25.62 47.32,27.69 47.64,28 R21.8
  Top 0.305: v28.27,24.13 28.27,6.98 30.43,4.83 J5.2
  Bottom 0.203: v28.27,24.13 28.78,24.13 29.67,25.02 43.13,25.02 v43.51,24.64
M_RESET  (via drill 0.3 pad 0.64)
  Top 0.305: J6.6 v52.02,1.91 | v66.5,3.81 67.39,3.81 67.51,3.68 SW1.2 | v72.59,3.81 73.48,2.92 73.54,2.92 RST.2
  Bottom 0.305: v52.02,1.91 53.92,3.81 v66.5,3.81 v72.59,3.81
M_SCK
  Top 0.305: U3.5 21.55,35.8 R37.1 20.9,34.67 20.9,33.78 19.33,32.2 19.33,28.88 19.63,28.57 J7.5
M_STV_IN  (via drill 0.3 pad 0.64)
  Top 0.203: U6.9 45.06,33.05 45.29,33.27 46.68,33.27 46.94,33.02 46.94,30.1 47.45,29.59 R21.6 49.35,29.59 49.48,29.46 49.48,27.56 49.22,27.3 47.95,27.3 47.7,27.05 47.7,25.44 46.27,24 42.75,24 v42.62,24.13 | J5.4 25.35,5.08
  Top 0.305: 25.22,5.08 25.35,5.08 25.35,5.33 27,6.98 v27,23.88
  Bottom 0.203: v27,23.88 27.51,23.88 27.89,23.5 28.78,23.5 29.92,24.64 42.11,24.64 v42.62,24.13
M_TEMP_SEN  (via drill 0.3 pad 0.64)
  Top 0.203: v65.99,26.67 65.99,28.19 C56.2
  Top 0.254: U9.4 63.21,29.23 R23.2 C56.2
  Top 0.305: J5.1 v32.97,3.81
  Bottom 0.203: v32.97,3.81 32.97,20.83 35.64,23.5 43.89,23.5 47.32,26.92 65.73,26.92 v65.99,26.67
M_VCC_3V3
  Top 0.61: Q5.3 57.73,9.14 56.46,7.87 50.75,7.87 48.21,5.33 J6.5
M_VCC_5V
  Top 0.61: J6.4 45.67,5.71 50.11,10.16 D3.+
  Top 0.813: R19.1 R14.2 D3.+
N$1
  Top 0.305: R2.1 57.29,1.14 PWR.2
N$2
  Top 0.61: Q5.1 54.18,11.94 R19.2
N$3
  Top 0.61: D5.- D6.+ 54.05,17.53 C15.2
N$4
  Top 0.61: Q7.2 47.7,15.11 R29.1 R30.1 43.26,15.11 D7.- 42.24,14.1
N$6
  Top 0.203: R27.2 R28.2 55.32,37.59 Q2.1
N$7
  Top 0.305: U3.11 20.9,44.83 R11.1
N$8
  Top 0.406: U2.3 45.92,11.43 D3.- 48.08,11.05 C30.2
N$9
  Top 0.406: R26.1 50.49,15.11 Q7.3
  Top 0.61: C15.1 51.51,14.99 R26.1
N$10
  Top 0.203: R42.1 R39.2 53.16,44.2 53.29,44.07 53.42,44.07 | 53.42,44.07 Q8.1 | Q9.1 49.73,44.45 53.29,44.45 53.42,44.32 53.42,44.07
N$11
  Top 0.203: R25.2 53.42,33.91 Q3.1 55.7,33.91 57.48,35.69 Q2.3
N$12
  Top 0.203: R32.2 R31.1
N$13
  Top 0.203: 41.8,42.48 R16.1 42.43,43.18 47.32,43.18 47.95,43.81 Q10.3
N$14
  Top 0.305: R36.2 45.67,46.23 arc-90 Q10.1
N$15
  Top 0.203: U8.14 77.71,43.22 77.55,43.05 68.15,43.05 67.39,42.29 C4.1
N$16
  Top 0.203: R18.2 49.99,42.04 | 49.99,42.04 49.99,42.29 Q9.2 | Q8.2 53.54,41.91 53.03,41.91 52.91,41.78 50.11,41.78 50.11,41.91 49.99,42.04
N$19
  Top 0.203: U6.12 43.11,33.26 43.51,33.66 46.81,33.66 47.32,33.15 47.32,30.86 47.76,30.42 R21.5
N$20
  Top 0.203: U4.3 31.68,28.97 30.81,29.84 27.45,29.84 R12.1
N$21
  Top 0.203: 27.51,30.61 R12.2 28.14,30.73 28.65,30.23 31.08,30.23 33.63,27.68 U4.6 33.6,26.32
N$22
  Top 0.203: U4.8 34.33,31.08 33.86,30.61 28.9,30.61 28.02,31.5 R12.3
N$23
  Top 0.203: R15.1 42.56,28 43.11,27.45 U6.3
N$24
  Top 0.203: R15.3 44.27,29.59 45.76,31.08 U6.8
N$25
  Top 0.203: R15.4 43.19,30.42 43.76,30.99 U6.11
N$26
  Top 0.203: R15.2 43.76,28.83 45.06,27.53 U6.6
N$27
  Top 0.203: U4.11 32.33,31.24 32.21,31.11 29.16,31.11 27.95,32.32 R12.4
N$28
  Top 0.203: Q11.1 45.61,42.48 R16.8 42.81,42.48 41.99,41.66 R16.2
N$30
  Top 0.203: R1.2 R6.1
N$34  (via drill 0.3 pad 0.64)
  Top 0.203: C34.1 68.91,25.02 69.8,25.91 v72.34,25.91
  Bottom 0.203: U7.10 74.84,24.05 72.97,25.91 v72.34,25.91
N$35  (via drill 0.3 pad 0.64)
  Top 0.203: v71.7,25.27 70.81,25.27 70.69,25.15 C34.2
  Bottom 0.203: U7.11 74.7,23.55 72.97,25.27 v71.7,25.27
N$36  (via drill 0.3 pad 0.64)
  Top 0.203: C39.1 75.77,22.73 74.88,23.62 73.48,23.62 v72.85,24.26
  Bottom 0.203: U7.12 74.06,23.05 v72.85,24.26
N$37  (via drill 0.3 pad 0.64)
  Top 0.203: C39.2 73.99,22.73 73.48,23.24 v72.97,23.24
  Bottom 0.203: U7.13 73.67,22.55 v72.97,23.24
N$39
  Top 0.203: U8.15 79.2,42.67 69.55,42.67 69.16,42.29 C4.2
N$40
  Top 0.203: U8.12 77.69,44.22 77.29,43.81 69.8,43.81 69.42,44.2 69.42,44.32 C3.1
N$41
  Top 0.203: U8.17 73.92,41.72 73.86,41.66 C31.2
N$42
  Top 0.203: U8.16 72.9,42.22 72.08,41.4 C31.1
N$43
  Top 0.203: U8.18 75.58,41.22 74.56,40.2 70.75,40.2 69.93,41.02 68.15,41.02 67.51,40.39 67.51,40.13 C8.1
N$44
  Top 0.203: U8.19 75.59,40.72 74.69,39.81 69.35,39.81 C8.2
N$45
  Top 0.203: U8.21 75.6,39.72 74.88,38.99 73.86,38.99 C33.2
N$46
  Top 0.203: U8.20 75.6,40.22 74.81,39.43 72.78,39.43 72.21,38.86 72.21,38.61 C33.1
N$47
  Top 0.203: U8.22 76.38,39.22 74.62,37.47 69.29,37.47 69.16,37.59 C5.1
N$48
  Top 0.203: U8.23 76.51,38.72 74.75,36.96 68.15,36.96 67.39,37.72 C5.2
N$49
  Top 0.203: U8.24 76.64,38.22 75.01,36.58 68.27,36.58 67.39,35.69 C7.1
N$50
  Top 0.203: U8.25 76.78,37.72 75.26,36.2 69.67,36.2 69.16,35.69 C7.2
N$51
  Top 0.203: U8.26 76.91,37.22 75.51,35.81 72.85,35.81 72.08,35.05 C36.1
N$52
  Top 0.203: U8.27 77.05,36.72 75.64,35.31 73.86,35.31 C36.2
N$53
  Top 0.203: U8.28 77.19,36.22 74.75,33.78 70.56,33.78 69.93,34.42 68.15,34.42 67.39,33.66 C9.1
N$54
  Top 0.203: U8.29 77.32,35.72 75.01,33.4 C9.2
N$55
  Top 0.203: U8.30 77.45,35.22 75.26,33.02 72.85,33.02 72.08,32.26 C38.1
N$56
  Top 0.203: U8.31 77.59,34.72 75.39,32.51 73.86,32.51 C38.2
N$57
  Top 0.203: U8.32 77.72,34.22 74.5,30.99 69.55,30.99 C6.1
N$58
  Top 0.203: U8.11 77.68,44.72 77.16,44.2 71.2,44.2 R1.1
N$67
  Top 0.203: U8.43 76.64,28.71 75.77,29.59 73.86,29.59 R17.1
N$74
  Top 0.305: U3.3 20.25,39 22.27,41.02 24.71,41.02 arc90 R8.1
N$76
  Top 0.305: R10.1 22.81,39.37 22.2,38.77 U3.6
N$80
  Top 0.305: U3.8 22.9,45.05 R9.1
N$81  (via drill 0.3 pad 0.64)
  Top 0.203: C35.1 68.91,22.73 69.8,23.62 v72.21,23.62
  Bottom 0.203: U7.14 73.15,22.05 72.34,22.86 72.34,23.5 v72.21,23.62
N$82
  Top 0.203: U8.13 77.7,43.72 77.42,43.43 68.27,43.43 67.39,44.32 C3.2
N$85  (via drill 0.3 pad 0.64)
  Top 0.203: 70.69,22.35 C35.2 70.69,22.73 70.81,22.86 v71.7,22.86
  Bottom 0.203: U7.15 73.02,21.55 v71.7,22.86
N$87
  Top 0.305: R5.2 73.42,1.14 RST.1
N$88  (via drill 0.3 pad 0.64)
  Top 0.203: v72.34,21.34 74.88,21.34 75.64,20.57 75.64,20.32 C32.1
  Bottom 0.203: U7.16 72.63,21.05 v72.34,21.34
N$89  (via drill 0.3 pad 0.64)
  Top 0.203: v71.83,20.57 73.99,20.57 C32.2
  Bottom 0.203: U7.17 71.86,20.55 v71.83,20.57
N$90  (via drill 0.3 pad 0.64)
  Top 0.203: 70.81,19.68 70.69,19.81 70.69,19.94 | 70.69,19.94 C37.1 | v72.47,19.94 70.69,19.94
  Bottom 0.203: U7.18 72.57,20.05 v72.47,19.94
N$91  (via drill 0.3 pad 0.64)
  Top 0.203: v72.59,19.05 69.8,19.05 68.91,19.94 C37.2
  Bottom 0.203: U7.19 73.09,19.55 v72.59,19.05
N$92  (via drill 0.3 pad 0.64)
  Top 0.203: v72.97,18.29 73.86,18.29 73.99,18.16 C10.1
  Bottom 0.203: U7.20 73.73,19.05 v72.97,18.29
N$93  (via drill 0.3 pad 0.64)
  Top 0.203: C10.2 75.77,17.65 74.88,16.76 73.48,16.76 v71.83,18.41
  Bottom 0.203: U7.21 74.12,18.55 73.23,17.65 72.59,17.65 v71.83,18.41
N$94  (via drill 0.3 pad 0.64)
  Top 0.203: v71.83,17.53 71.07,17.53 | 71.07,17.53 70.94,17.53 | C11.1 71.07,17.53
  Bottom 0.203: U7.22 74.13,18.05 73.35,17.27 72.08,17.27 v71.83,17.53
N$95  (via drill 0.3 pad 0.64)
  Top 0.203: 69.04,17.65 69.04,17.4 69.16,17.4 | 69.16,17.4 69.8,16.76 72.34,16.76 v72.47,16.64 | C11.2 68.91,17.65 69.16,17.4
  Bottom 0.203: U7.23 74.39,17.55 73.48,16.64 v72.47,16.64
N$96  (via drill 0.3 pad 0.64)
  Top 0.203: v72.97,16 73.86,16 73.99,15.88 C12.1
  Bottom 0.203: U7.24 74.53,17.05 73.48,16 v72.97,16
N$97  (via drill 0.3 pad 0.64)
  Top 0.203: C12.2 75.64,15.49 75.64,15.24 74.88,14.48 73.35,14.48 v71.83,16
  Bottom 0.203: U7.25 74.66,16.55 73.48,15.37 72.47,15.37 v71.83,16
N$98  (via drill 0.3 pad 0.64)
  Top 0.203: C13.1 70.69,15.11 v71.83,15.11
  Bottom 0.203: U7.26 74.8,16.05 73.61,14.86 72.08,14.86 v71.83,15.11
N$99  (via drill 0.3 pad 0.64)
  Top 0.203: C13.2 68.91,15.37 69.8,14.48 71.58,14.48 v71.83,14.22
  Bottom 0.203: U7.27 74.93,15.55 73.74,14.35 71.96,14.35 v71.83,14.22
N$100  (via drill 0.3 pad 0.64)
  Top 0.203: v73.1,13.72 73.74,13.72 73.99,13.46 C14.1
  Bottom 0.203: U7.28 75.07,15.05 73.74,13.72 v73.1,13.72
N$101  (via drill 0.3 pad 0.64)
  Top 0.203: C14.2 75.51,13.08 75.51,12.83 74.88,12.19 73.61,12.19 v72.28,13.53
  Bottom 0.203: U7.29 75.2,14.55 73.74,13.08 72.72,13.08 v72.28,13.53
S_MOSI  (via drill 0.3 pad 0.64)
  Top 0.203: 31.74,15.62 J2.3 30.11,15.58 28.9,16.78 28.9,24.46 28.52,24.84 v28.52,25.53 | U8.38 81,31.21 81.74,30.48 81.74,27.3 81.23,26.8 v80.59,26.8
  Top 0.305: R8.2 v27.51,41.27 28.72,41.27 U5.6
  Bottom 0.203: 28.52,25.78 45.67,25.78 47.19,27.3 74.5,27.3 75.08,26.72 76.83,26.72 77.55,27.43 79.7,27.43 80.34,26.8 v80.59,26.8 80.97,26.8 81.1,26.67 82.88,26.67 83.01,26.54 U7.5 | 28.52,25.78 24.97,25.78 23.7,27.05 23.7,40.2 24.01,40.51 26.75,40.51 v27.51,41.27 | v28.52,25.53 28.52,25.78
S_SCK  (via drill 0.3 pad 0.64)
  Top 0.203: U5.1 28.84,39.31 28.9,39.37 | J2.5 30.17,17.78 29.41,18.54 29.41,24.64 29.16,24.89 29.16,26.23 v29.03,26.35 | U8.39 80.99,30.71 81.36,30.35 81.36,27.81 v81.1,27.56
  Top 0.305: R10.2 v27.51,39.37 28.9,39.37 28.9,39.18 U5.1
  Bottom 0.203: 29.03,26.16 45.54,26.16 47.07,27.69 74.75,27.69 75.3,27.14 76.62,27.14 77.29,27.81 79.83,27.81 80.21,27.43 81.1,27.43 | 29.03,26.16 25.17,26.16 24.08,27.25 24.08,40 24.21,40.13 24.46,40.13 24.59,40 24.59,38.73 24.71,38.61 24.97,38.61 25.09,38.73 25.09,40 25.22,40.13 25.48,40.13 25.6,40 25.6,38.73 25.73,38.61 25.98,38.61 26.11,38.73 26.11,40 26.24,40.13 26.49,40.13 26.62,40 26.62,38.73 26.75,38.61 27.38,38.61 27.51,38.73 v27.51,39.37 | 29.03,26.16 v29.03,26.35 | 81.1,27.43 81.23,27.43 81.61,27.05 U7.4 | v81.1,27.56 81.1,27.43
SD_DO
  Top 0.203: J2.7 33.55,19.98 35,21.43 35,33 34.72,33.27 33.98,33.27 33.63,32.92 U4.9
VCC_3V3  (via drill 0.3 pad 0.64)
  Top 0.203: 30.74,41.81 U5.4 30.68,41.46 | 32.84,41.15 C42.2 | Q3.2 55.57,32.13 56.46,33.02 56.46,33.78 56.97,34.29
  Top 0.254: 56.97,34.29 T_3V3.T
  Top 0.305: U6.14 41.76,34.29 C47.2 | C43.2 43.51,44.45 45.54,44.45 45.8,44.2 Q10.2 | R13.2 34.49,39.75 39.7,39.75 | 39.7,39.75 39.95,39.75 | 39.7,39.75 39.95,40 | 39.7,39.75 39.95,39.5 | R13.2 34.37,39.5 33.1,38.23 33.1,36.2 32.46,35.56 31.44,35.56 30.17,34.29 | R13.2 34.37,39.75 C42.2 | 30.68,41.46 30.68,42.29 30.43,42.55 27.89,42.55 v27.51,42.16 | 42.49,16.64 42.49,17.4 D7.+ | 62.18,5.59 62.18,5.33
  Top 0.406: U4.14 30.33,34.26 C22.2 30.17,34.29 R24.1 | U3.14 18.9,45.18 C40.2 17.6,45.59 17.09,46.1 17.09,48.13 17.86,48.89 20.9,48.89 v21.79,48.01 R4.2 | U5.4 32.71,41.4 C42.2 | C41.2 R25.1 55.32,32.26 Q3.2 | C45.2 38.68,20.12 41.93,23.37 56.08,23.37 | C29.+ 36.65,12.89 | 36.65,12.89 37.99,12.89 R40.1 | C28.2 36.78,13.02 36.65,12.89 | J2.4 31.74,16.64 C44.2 35.06,16.64 36.59,15.11 C28.2 | C28.2 37.03,15.11 38.56,16.64 C45.2 | C45.2 C49.2 42.49,16.64 R30.2 | C43.2 42.11,43.56 40.72,43.56 39.95,42.8 39.95,40 39.95,39.75 39.95,39.5 39.95,36.45 41.99,34.42 C47.2 46.94,34.29 48.97,32.26 C41.2 | 56.08,23.37 56.34,23.37 | 56.34,23.37 56.46,23.37 | 56.34,23.62 R22.1 C48.2 54.24,27.81 52.72,29.34 C46.2 52.4,29.46 52.4,29.65 51.38,30.67 C41.2 | 56.34,23.5 56.34,23.37 | 56.34,23.62 56.08,23.37 | 56.46,23.37 62.18,17.65 62.18,5.59 | 61.92,5.33 62.18,5.33 62.43,5.33 | 61.92,5.33 59.58,5.33 PWR.1 | 62.43,5.33 69.04,5.33 R5.1 | 62.18,5.59 61.92,5.33 | 62.18,5.59 62.43,5.33 | 56.34,23.62 56.34,23.5 | 56.34,23.5 56.46,23.37
  Bottom 0.305: v27.51,42.16 23.7,42.16 21.79,44.07 v21.79,48.01
VCC_3V3_EPD  (via drill 0.3 pad 0.64)
  Top 0.203: U8.10 78.05,45.22 v77.8,45.47 78.05,45.72 U8.9 | U8.49 77.61,25.71 76.15,27.18 74.75,27.18 R17.2
  Top 0.254: Q3.3 60.27,33.02 T_E3V3.T
  Top 0.305: R17.2 72.21,29.84 72.85,30.48 74.88,30.48 v77.42,33.02 | v57.48,31.88 Q3.3 | U8.49 80.15,25.71 80.34,25.53 80.34,18.29 C50.2 C51.2 v79.96,13.33 | v77.8,45.47 77.29,44.96 C53.2 C52.2
  Bottom 0.203: U7.32 82.79,13.05 82.5,13.33 82.71,13.55 U7.31
  Bottom 0.305: 82.5,13.33 v79.96,13.33 | v77.8,45.47 77.8,33.4 v77.42,33.02 75.26,30.86 58.5,30.86 v57.48,31.88
VCC_OUT  (via drill 0.38 pad 0.81)
  Top 0.61: R40.2 38.81,10.54 C54.1 | Q5.2 v55.7,8.89 | C54.1 U2.2 | C54.1 41.22,9.52 v41.86,8.89
  Bottom 0.61: v55.7,8.89 v41.86,8.89
VCOM_DRIVER  (via drill 0.3 pad 0.64)
  Top 0.203: R31.2 73.99,11.56 73.35,11.56 v72.21,12.7
  Bottom 0.203: U7.30 75.34,14.05 73.99,12.7 v72.21,12.7
VDD
  Top 0.305: R22.2 56.46,29.46 C55.1 58.48,29.23 U9.1
WS_DO  (via drill 0.3 pad 0.64)
  Top 0.203: U5.5 v29.79,40.51 | U4.5 v32.98,27.18 v32.97,27.18
  Bottom 0.203: v32.97,27.18 32.71,26.92 28.68,26.92 28.32,27.28 28.32,39.04 v29.79,40.51

## Text on the board
tPlace: D7 | D13 | D0 | D8 | GND | NC | MISO | MOSI | SCK | NC | GND | A0 | GND | 5V | RESET | A5 | VIN | GND | 3V3
bPlace: Small e-Paper Shield | v2.1 11/05/2013 | by seeedstudio | www.seeedstudio.com